# Altium PCB PCB1.PcbDoc
Units mm, origin at the board's own origin, x right, y up, seen from the top; angles counter-clockwise.
Board outline 66.42 x 57.02 mm, 2 copper layers (Top Layer, Bottom Layer); 46 components, 41 nets, 140 pads, 7 vias.
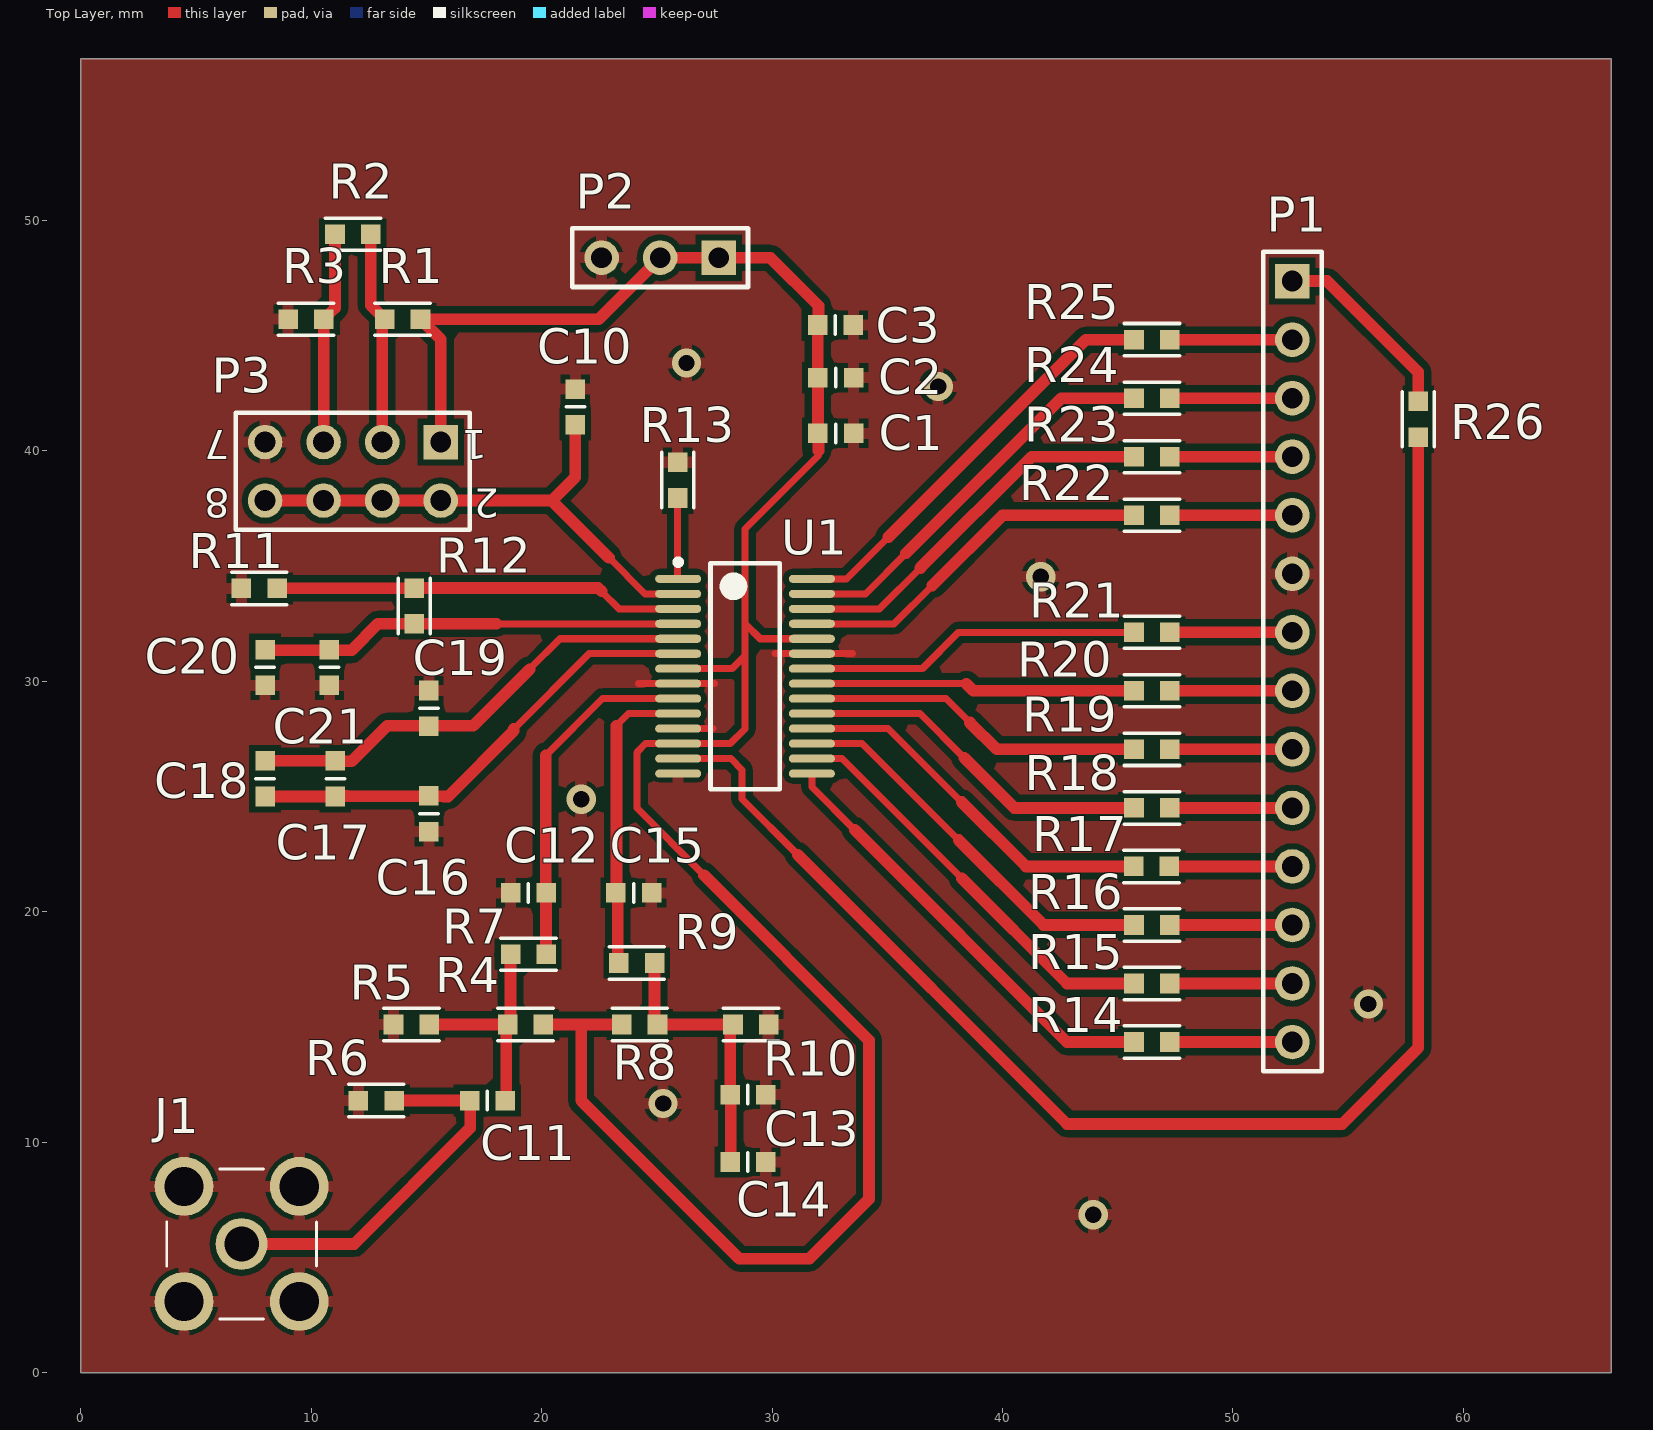
[diagram p0: Top Layer view]
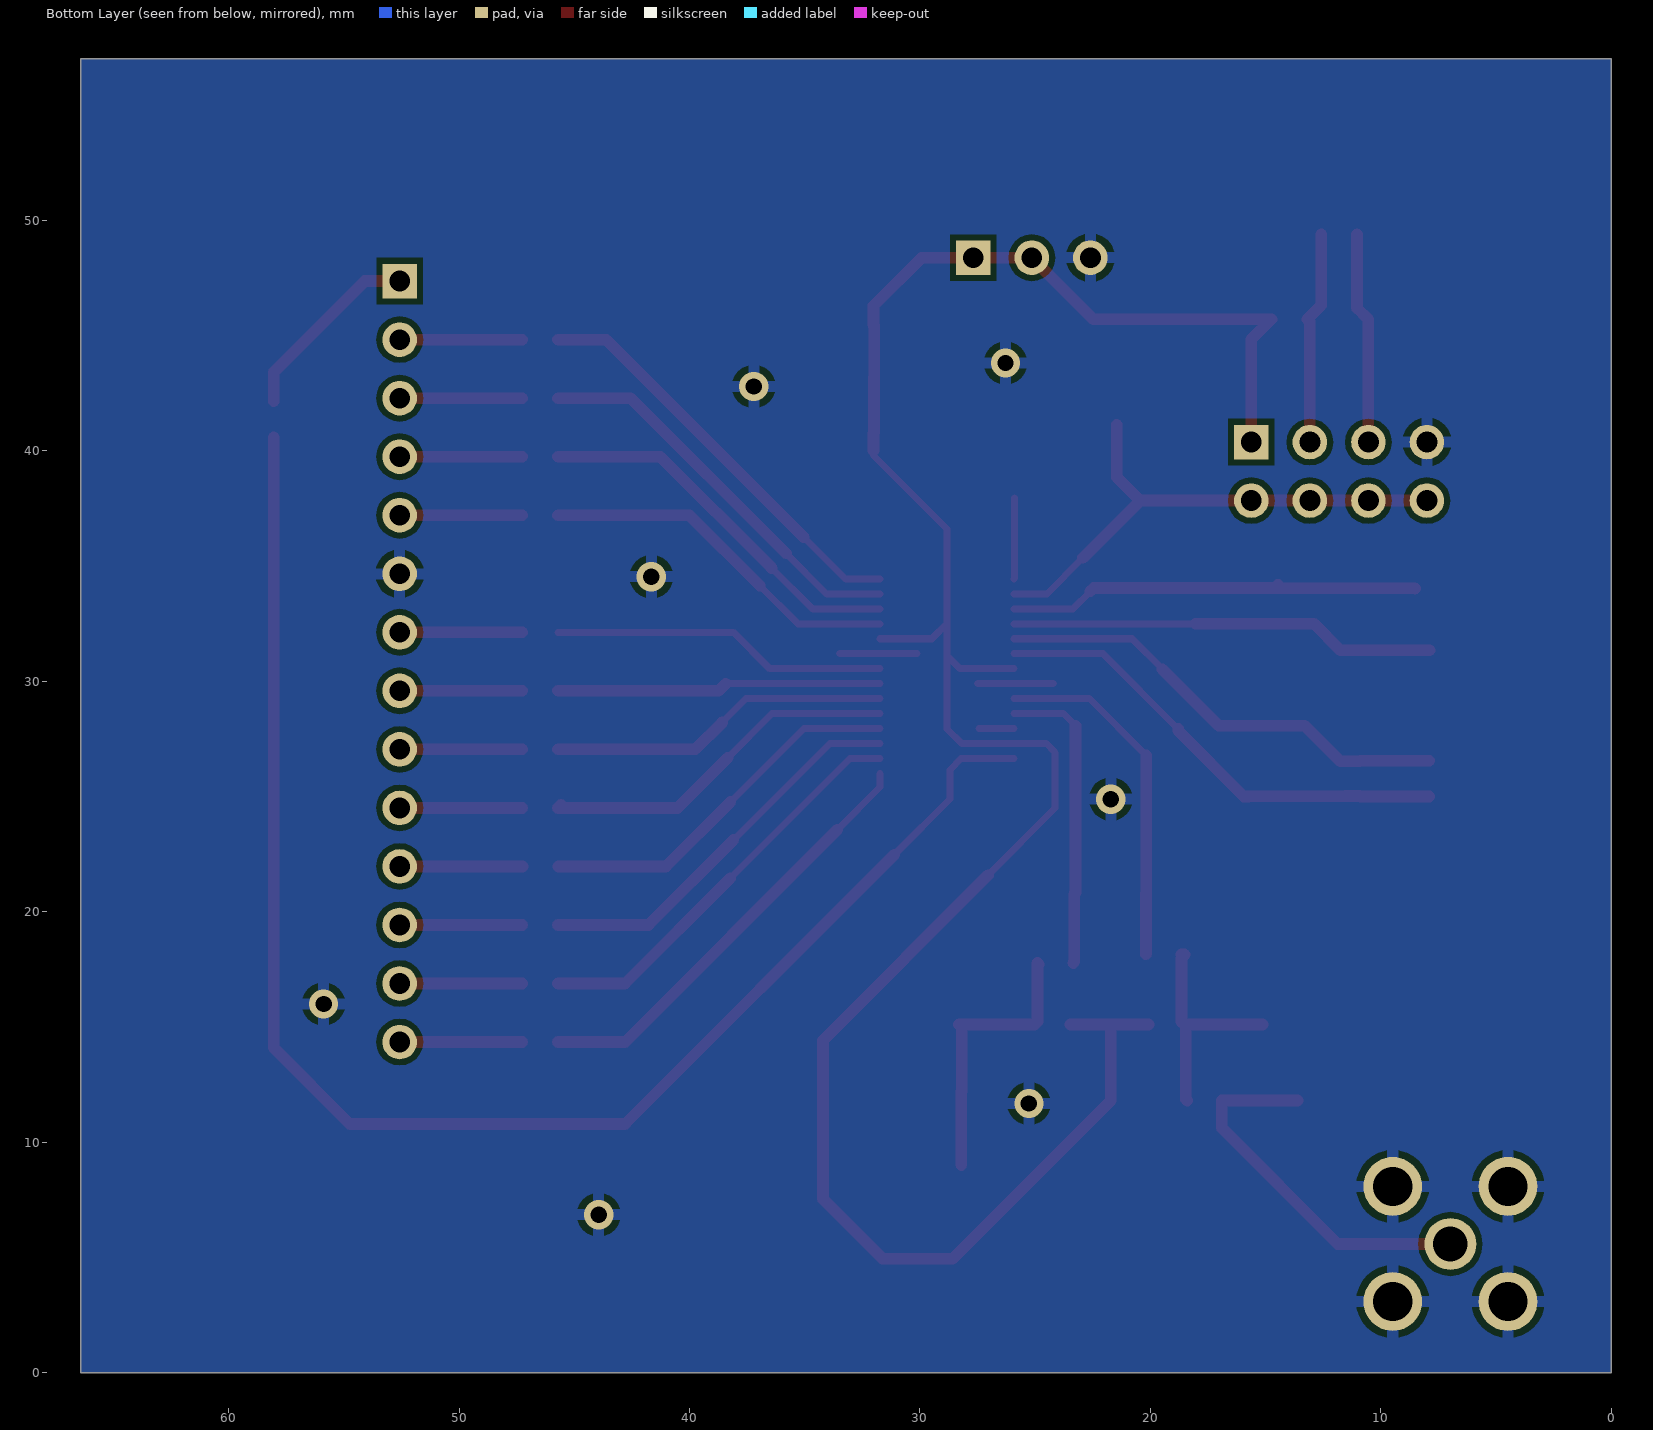
[diagram p1: Bottom Layer view, seen from below]
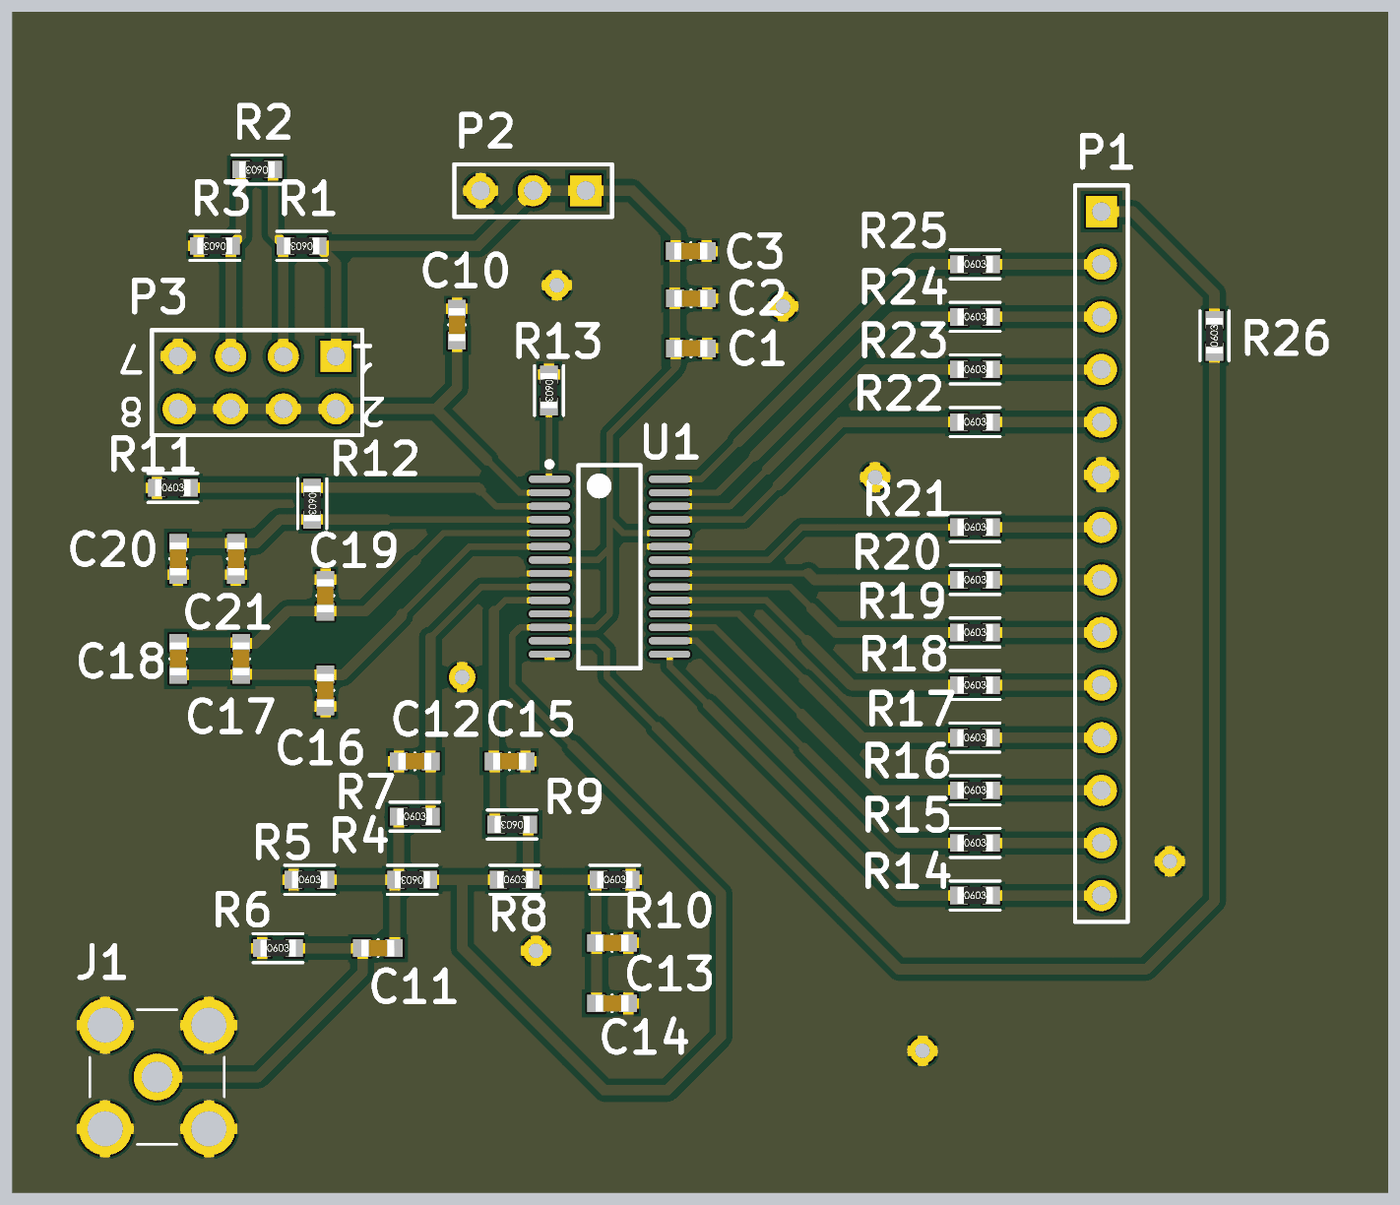
[diagram p2: 3D render of the assembled board from above, using the file's embedded part models]

## Layer stack, top to bottom
Top Solder: solder mask 0.0102, Solder Resist, Dk 3.5
Top Layer: signal copper 0.0356
Dielectric 1: dielectric 0.32, FR-4, Dk 4.8
Bottom Layer: signal copper 0.0356
Bottom Solder: solder mask 0.0102, Solder Resist, Dk 3.5

## Board outline
0,0 66.421,0 66.421,57.023 0,57.023

## Design rules (kind name [scope] priority, off if disabled: settings)
Clearance [All] p1: gap=0.254 ignorepadtopadclearanceinfootprint=FALSE except(0: Arc-Hole Track-Hole SMDPad-Hole THPad-Hole Via-Hole Fill-Hole Poly-Hole Region-Hole Text-Hole; 0.3: Arc-Via Arc-Fill Arc-Poly Arc-Region Track-Via Track-Fill Track-Poly Track-Region)
HoleSize [All] p1: absolutevalues=TRUE maxlimit=3 minlimit=0.7 maxpercent=80.000 minpercent=20.000
MinimumSolderMaskSliver [All] p1: minsoldermaskwidth=0.125
PlaneConnect [All] p1: planeconnectstyle=Relief reliefexpansion=0.508 reliefentries=4 reliefconductorwidth=0.305 reliefairgap=0.254
PolygonConnect [All] p1: connectstyle=Relief reliefconductorwidth=0.5 reliefentries=4 polygonreliefangle="90 Angle" airgapwidth=0.2
RoutingVias [All] p1: holewidth=0.7 width=1.6 viastyle="Through Hole" minholewidth=0.7 minwidth=1.6 maxholewidth=0.7 maxwidth=1.6
SilkToSilkClearance [All] p1: silktosilkclearance=0.12
SilkToSolderMaskClearance [IsPad] p1: minsilkscreentomaskgap=0.1 clearancetoexposedcopper=TRUE
SolderMaskExpansion [All] p1: expansion=0.102 istentingtop=FALSE
Width [All] p1: maxlimit=3.048 minlimit=0.305 preferedwidth=0.508
25 further rules are at their usual default settings.

## Components (designator, comment, footprint, x,y, rotation, side; value= is the part's Value field where it differs from the comment)
C1 "10µF" SMD-0603C 32.766,40.767 r90 top
C2 "0.10µF" SMD-0603C 32.766,43.18 r90 top
C3 "1nF" SMD-0603C 32.753,45.466 r90 top value=1000pF
C10 "0.10µF" SMD-0603C 21.463,41.91 r0 top
C11 "0.33µF" SMD-0603C 17.653,11.811 r270 top
C12 "15pF" SMD-0603C 19.431,20.828 r270 top
C13 "10µF" SMD-0603C 28.956,12.065 r90 top
C14 "0.10µF" SMD-0603C 28.956,9.144 r90 top
C15 "15pF" SMD-0603C 24.003,20.828 r90 top
C16 "0.10µF" SMD-0603C 15.113,24.257 r180 top
C17 "0.10µF" SMD-0603C 11.049,25.781 r180 top
C18 "10µF" SMD-0603C 8.001,25.781 r180 top
C19 "0.10µF" SMD-0603C 15.113,28.829 r180 top
C20 "10µF" SMD-0603C 8.001,30.607 r0 top
C21 "0.10µF" SMD-0603C 10.795,30.607 r0 top
J1 "SMACONNECTOR" LPRS_SMACONNECTOR 6.985,5.588 r0 top
P1 "Jrpi" HDR1X14 52.578,47.371 r270 top
P2 "Supply" HDR1X3 27.686,48.387 r180 top
P3 "Header 4X2" HDR2X4 15.621,40.386 r180 top
R1 "1k" SMD-0603-RES 13.97,45.72 r90 top
R2 "1k" SMD-0603-RES 11.811,49.403 r90 top
R3 "1k" SMD-0603-RES 9.779,45.72 r90 top
R4 "1k" SMD-0603-RES 19.304,15.113 r90 top
R5 "1k" SMD-0603-RES 14.351,15.113 r270 top
R6 "47" SMD-0603-RES 12.827,11.811 r270 top
R7 "22" SMD-0603-RES 19.431,18.161 r270 top
R8 "1k" SMD-0603-RES 24.257,15.113 r270 top
R9 "22" SMD-0603-RES 24.13,17.78 r90 top
R10 "1k" SMD-0603-RES 29.083,15.113 r270 top
R11 "NC" SMD-0603-RES 7.747,34.036 r270 top value=0.02
R12 "0" SMD-0603-RES 14.478,33.274 r180 top value=0.02
R13 "NC" SMD-0603-RES 25.908,38.735 r180 top value=0.02
R14 "390" SMD-0603-RES 46.482,14.351 r270 top
R15 "390" SMD-0603-RES 46.482,16.891 r270 top
R16 "390" SMD-0603-RES 46.482,19.431 r270 top
R17 "390" SMD-0603-RES 46.469,21.971 r270 top
R18 "390" SMD-0603-RES 46.482,24.511 r270 top
R19 "390" SMD-0603-RES 46.482,27.051 r270 top
R20 "390" SMD-0603-RES 46.482,29.591 r270 top
R21 "390" SMD-0603-RES 46.482,32.131 r270 top
R22 "390" SMD-0603-RES 46.482,37.211 r270 top
R23 "390" SMD-0603-RES 46.482,39.751 r270 top
R24 "390" SMD-0603-RES 46.482,42.291 r270 top
R25 "390" SMD-0603-RES 46.482,44.831 r270 top
R26 "390" SMD-0603-RES 58.039,41.376 r0 top
U1 "AD9235BRUZ-65" RU-28_M 28.829,30.226 r0 top

## Footprints (in the part's own frame and the unit in brackets; to place one, negate y for a bottom-side part, rotate by r counter-clockwise, add the part's x,y. Pads: shape width x height; smd on the part's side, far side on the other; paste and mask are expansions set on the pad)
HDR1X3 [mm] "Connector; Header; 3 Position"
  rect 1.5x1.5 hole 0.9: 1(0,0)
  round 1.5 hole 0.9: 2(2.54,0) 3(5.08,0)
  silkscreen extent -1.27,-1.27 6.35,1.27
HDR1X14 [mm] "Connector; Header; 14 Position"
  rect 1.5x1.5 hole 0.9: 1(0,0)
  round 1.5 hole 0.9: 2(2.54,0) 3(5.08,0) 4(7.62,0) 5(10.16,0) 6(12.7,0) 7(15.24,0) 8(17.78,0) 9(20.32,0) 10(22.86,0) 11(25.4,0) 12(27.94,0) 13(30.48,0) 14(33.02,0)
  silkscreen extent -1.27,-1.27 34.29,1.27
HDR2X4 [mm] "Connector; Header; 4x2 Position"
  rect 1.5x1.5 hole 0.9: 1(0,0)
  round 1.5 hole 0.9: 2(0,2.54) 3(2.54,0) 4(2.54,2.54) 5(5.08,0) 6(5.08,2.54) 7(7.62,0) 8(7.62,2.54)
  silkscreen extent -1.27,-1.27 8.89,3.81
LPRS_SMACONNECTOR [mm]
  round 2.25 hole 1.5: 1(0,0)
  round 2.55 hole 1.7: 2(2.5,2.5) 3(2.5,-2.5) 4(-2.5,-2.5) 5(-2.5,2.5)
  silkscreen extent -3.25,-3.25 3.25,3.25
RU-28_M [mm] "TSOP, 28-Leads, Body 9.7x4.4mm, Pitch 0.65mm, IPC Low Density"
  oval 2x0.35 smd: 1(-2.9,4.225) 2(-2.9,3.575) 3(-2.9,2.925) 4(-2.9,2.275) 5(-2.9,1.625) 6(-2.9,0.975) 7(-2.9,0.325) 8(-2.9,-0.325) 9(-2.9,-0.975) 10(-2.9,-1.625) 11(-2.9,-2.275) 12(-2.9,-2.925) 13(-2.9,-3.575) 14(-2.9,-4.225) 15(2.9,-4.225) 16(2.9,-3.575) 17(2.9,-2.925) 18(2.9,-2.275) 19(2.9,-1.625) 20(2.9,-0.975) 21(2.9,-0.325) 22(2.9,0.325) 23(2.9,0.975) 24(2.9,1.625) 25(2.9,2.275) 26(2.9,2.925) 27(2.9,3.575) 28(2.9,4.225)
  silkscreen extent -3.02,-4.9 1.5,5.07, body extent -2.25,-4.9 2.25,4.9, height 1.2
SMD-0603-RES [mm]
  rect 0.85x0.85 smd: 1(0,0.775) 2(0,-0.775)
  silkscreen extent -0.7,-1.2 0.7,1.2, body extent -0.4,-0.85 0.4,0.85, height 0.56
SMD-0603C [mm]
  rect 0.85x0.85 smd: 1(0,0.775) 2(0,-0.775)
  silkscreen extent -0.4,0 0.4,0, body extent -0.4,-0.8 0.4,0.8, height 0.9

## Part data
C1 C13 C18 C20: library part GRM185R60J106ME15D, "CAP CER 10UF 6.3V X5R 0603", Digi-Key Part Number=490-10467-1-ND, Manufacturer="Murata Electronics North America", Operating Temperature="-55°C ~ 85°C", Package / Case="0603 (1608 Metric)", Ratings=-, Temperature Coefficient=X5R, Tolerance=±20%, Voltage=6.3V, @ qty=0, Applications="General Purpose", Datasheets=http://www.murata.com/~/media/webrenewal/support/library/catalog/products/capacitor/mlcc/c02e.pdf, Factory Stock=0, Features="Derating Recommended", Height - Seated (Max)=-, Image=//media.digikey.com/Renders/Murata%20Renders/ZRB-SERIES-0402.jpg, Lead Spacing=-, Lead Style=-, Minimum Quantity=1, Mounting Type="Surface Mount, MLCC", Packaging="Cut Tape (CT)", Part Number=GRM185R60J106ME15D, Part Status=Active, Quantity Available=25068, Series=GRM, Size / Dimension="0.063\" L x 0.031\" W (1.60mm x 0.80mm)", Thickness (Max)="0.022\" (0.55mm)", Unit Price (USD)=0.36
C2 C10 C14 C16 C17 C19 C21: library part GCJ188R71C104KA01D, "CAP CER 0.1UF 16V X7R 0603", Digi-Key Part Number=490-5796-1-ND, Manufacturer="Murata Electronics North America", Operating Temperature="-55°C ~ 125°C", Package / Case="0603 (1608 Metric)", Ratings=AEC-Q200, Temperature Coefficient=X7R, Tolerance=±10%, Voltage=16V, @ qty=0, Applications="Automotive, Boardflex Sensitive", Datasheets=http://www.murata.com/~/media/webrenewal/support/library/catalog/products/capacitor/mlcc/c03e.ashx, Factory Stock=0, Features="Soft Termination", Height - Seated (Max)=-, Image=//media.digikey.com/Renders/Murata%20Renders/0603%28LQG18%29.jpg, Lead Spacing=-, Lead Style=-, Minimum Quantity=1, Mounting Type="Surface Mount, MLCC", Packaging="Cut Tape (CT)", Part Number=GCJ188R71C104KA01D, Part Status=Active, Quantity Available=22473, Series=GCJ, Size / Dimension="0.063\" L x 0.031\" W (1.60mm x 0.80mm)", Thickness (Max)="0.035\" (0.90mm)", Unit Price (USD)=0.21
C3: library part GCJ188R71H102KA01D, "CAP CER 1000PF 50V X7R 0603", Digi-Key Part Number=490-5768-1-ND, Manufacturer="Murata Electronics North America", Operating Temperature="-55°C ~ 125°C", Package / Case="0603 (1608 Metric)", Ratings=AEC-Q200, Temperature Coefficient=X7R, Tolerance=±10%, Voltage=50V, @ qty=0, Applications="Automotive, Boardflex Sensitive", Datasheets=http://www.murata.com/~/media/webrenewal/support/library/catalog/products/capacitor/mlcc/c03e.ashx, Factory Stock=0, Features="Soft Termination", Height - Seated (Max)=-, Image=//media.digikey.com/Renders/Murata%20Renders/0603%28LQG18%29.jpg, Lead Spacing=-, Lead Style=-, Minimum Quantity=1, Mounting Type="Surface Mount, MLCC", Packaging="Cut Tape (CT)", Part Number=GCJ188R71H102KA01D, Part Status=Active, Quantity Available=21434, Series=GCJ, Size / Dimension="0.063\" L x 0.031\" W (1.60mm x 0.80mm)", Thickness (Max)="0.031\" (0.80mm)", Unit Price (USD)=0.16
C11: library part GCM188R71C334KA37D, "CAP CER 0.33UF 16V X7R 0603", Digi-Key Part Number=490-6050-1-ND, Manufacturer="Murata Electronics North America", Operating Temperature="-55°C ~ 125°C", Package / Case="0603 (1608 Metric)", Ratings=AEC-Q200, Temperature Coefficient=X7R, Tolerance=±10%, Voltage=16V, @ qty=0, Applications=Automotive, Datasheets=http://www.murata.com/~/media/webrenewal/support/library/catalog/products/capacitor/mlcc/c03e.ashx, Factory Stock=0, Features=-, Height - Seated (Max)=-, Image=//media.digikey.com/Renders/Murata%20Renders/0603%28GCM188%29.jpg, Lead Spacing=-, Lead Style=-, Minimum Quantity=1, Mounting Type="Surface Mount, MLCC", Packaging="Cut Tape (CT)", Part Number=GCM188R71C334KA37D, Part Status=Active, Quantity Available=10234, Series=GCM, Size / Dimension="0.063\" L x 0.031\" W (1.60mm x 0.80mm)", Thickness (Max)="0.035\" (0.90mm)", Unit Price (USD)=0.19
C12 C15: library part GCM1885C1H150JA16D, "CAP CER 15PF 50V NP0 0603", Digi-Key Part Number=490-4957-1-ND, Manufacturer="Murata Electronics North America", Operating Temperature="-55°C ~ 125°C", Package / Case="0603 (1608 Metric)", Ratings=AEC-Q200, Temperature Coefficient="C0G, NP0", Tolerance=±5%, Voltage=50V, @ qty=0, Applications=Automotive, Datasheets=http://www.murata.com/~/media/webrenewal/support/library/catalog/products/capacitor/mlcc/c03e.ashx, Factory Stock=0, Features=-, Height - Seated (Max)=-, Image=//media.digikey.com/Renders/Murata%20Renders/0603%28GCM188%29.jpg, Lead Spacing=-, Lead Style=-, Minimum Quantity=1, Mounting Type="Surface Mount, MLCC", Packaging="Cut Tape (CT)", Part Number=GCM1885C1H150JA16D, Part Status=Active, Quantity Available=99209, Series=GCM, Size / Dimension="0.063\" L x 0.031\" W (1.60mm x 0.80mm)", Thickness (Max)="0.035\" (0.90mm)", Unit Price (USD)=0.1
J1: "SMA female RF coaxial connector for SMA male RF antennas.", Package=None, Availability=Unavailable, MP=SMACONNECTOR, Price=None
P1: library part "Header 14", "Header, 14-Pin", LatestRevisionDate=17-Jul-2002, LatestRevisionNote="Re-released for DXP Platform.", Publisher="Altium Limited"
P2: library part "Header 3", "Header, 3-Pin", LatestRevisionDate=17-Jul-2002, LatestRevisionNote="Re-released for DXP Platform.", Publisher="Altium Limited"
P3: "Header, 4-Pin, Dual row", LatestRevisionDate=17-Jul-2002, LatestRevisionNote="Re-released for DXP Platform.", Publisher="Altium Limited"
R1 R2 R3 R4 R5 R8 R10: library part ERJ-3EKF1001V, "RES SMD 1K OHM 1% 1/10W 0603", Digi-Key Part Number=P1.00KHCT-ND, Manufacturer="Panasonic Electronic Components", Operating Temperature="-55°C ~ 155°C", Package / Case="0603 (1608 Metric)", Power (Watts)="0.1W, 1/10W", Supplier Device Package=0603, Temperature Coefficient=±100ppm/°C, Tolerance=±1%, @ qty=1500, Composition="Thick Film", Datasheets=http://industrial.panasonic.com/www-cgi/jvcr13pz.cgi?E+PZ+3+AOA0002+ERJ3EKF1001V+7+WW, Factory Stock=0, Failure Rate=-, Features="Automotive AEC-Q200", Height - Seated (Max)="0.022\" (0.55mm)", Image=//media.digikey.com/Photos/Panasonic%20Photos/MFG_ERJ-P6W%20Series.jpg, Minimum Quantity=1, Number of Terminations=2, Packaging="Cut Tape (CT)", Part Number=ERJ-3EKF1001V, Part Status=Active, Quantity Available=5218845, Series=ERJ, Size / Dimension="0.063\" L x 0.031\" W (1.60mm x 0.80mm)", Unit Price (USD)=0.00379
R6: library part ERJ-PA3F47R0V, "RES SMD 47 OHM 1% 1/4W 0603", Digi-Key Part Number=P47.00BYCT-ND, Manufacturer="Panasonic Electronic Components", Operating Temperature="-55°C ~ 155°C", Package / Case="0603 (1608 Metric)", Power (Watts)="0.25W, 1/4W", Supplier Device Package=0603, Temperature Coefficient=±100ppm/°C, Tolerance=±1%, @ qty=1500, Composition="Thick Film", Datasheets=https://industrial.panasonic.com/cdbs/www-data/pdf/RDA0000/AOA0000C243.pdf, Factory Stock=0, Failure Rate=-, Features="Automotive AEC-Q200, Pulse Withstanding", Height - Seated (Max)="0.022\" (0.55mm)", Image=//media.digikey.com/Photos/Panasonic%20Photos/MFG_ERJ-P6W%20Series.jpg, Minimum Quantity=1, Number of Terminations=2, Packaging="Cut Tape (CT)", Part Number=ERJ-PA3F47R0V, Part Status=Active, Quantity Available=13707, Series=ERJ, Size / Dimension="0.063\" L x 0.031\" W (1.60mm x 0.80mm)", Unit Price (USD)=0.02372
R7 R9: library part ERJ-3GEYJ220V, "RES SMD 22 OHM 5% 1/10W 0603", Digi-Key Part Number=P22GCT-ND, Manufacturer="Panasonic Electronic Components", Operating Temperature="-55°C ~ 155°C", Package / Case="0603 (1608 Metric)", Power (Watts)="0.1W, 1/10W", Supplier Device Package=0603, Temperature Coefficient=±200ppm/°C, Tolerance=±5%, @ qty=1500, Composition="Thick Film", Datasheets=http://industrial.panasonic.com/www-cgi/jvcr13pz.cgi?E+PZ+3+AOA0001+ERJ3GEYJ220V+7+WW, Factory Stock=0, Failure Rate=-, Features="Automotive AEC-Q200", Height - Seated (Max)="0.022\" (0.55mm)", Image=//media.digikey.com/Photos/Panasonic%20Photos/MFG_ERJ-P6W%20Series.jpg, Minimum Quantity=1, Number of Terminations=2, Packaging="Cut Tape (CT)", Part Number=ERJ-3GEYJ220V, Part Status=Active, Quantity Available=349892, Series=ERJ, Size / Dimension="0.063\" L x 0.031\" W (1.60mm x 0.80mm)", Unit Price (USD)=0.00321
R11 R12 R13: library part ERJ-3BWFR020V, "RES SMD 0.02 OHM 1% 1/3W 0603", Digi-Key Part Number=P17461CT-ND, Manufacturer="Panasonic Electronic Components", Operating Temperature="-55°C ~ 155°C", Package / Case="0603 (1608 Metric)", Power (Watts)="0.333W, 1/3W", Supplier Device Package=0603, Temperature Coefficient=±250ppm/°C, Tolerance=±1%, @ qty=1500, Composition="Thick Film", Datasheets=https://industrial.panasonic.com/cdbs/www-data/pdf/RDA0000/AOA0000C239.pdf, Factory Stock=0, Failure Rate=-, Features="Automotive AEC-Q200, Current Sense", Height - Seated (Max)="0.026\" (0.65mm)", Image=//media.digikey.com/Photos/Panasonic%20Photos/MFG_ERJ-P6W%20Series.jpg, Minimum Quantity=1, Number of Terminations=2, Packaging="Cut Tape (CT)", Part Number=ERJ-3BWFR020V, Part Status=Active, Quantity Available=4366, Series=ERJ, Size / Dimension="0.063\" L x 0.031\" W (1.60mm x 0.80mm)", Unit Price (USD)=0.07040
R14 R15 R16 R17 R18 R19 R20 R21 R22 R23 R24 R25 R26: library part ERJ-3EKF3900V, "RES SMD 390 OHM 1% 1/10W 0603", Digi-Key Part Number=P390HCT-ND, Manufacturer="Panasonic Electronic Components", Operating Temperature="-55°C ~ 155°C", Package / Case="0603 (1608 Metric)", Power (Watts)="0.1W, 1/10W", Supplier Device Package=0603, Temperature Coefficient=±100ppm/°C, Tolerance=±1%, @ qty=1500, Composition="Thick Film", Datasheets=http://industrial.panasonic.com/www-cgi/jvcr13pz.cgi?E+PZ+3+AOA0002+ERJ3EKF3900V+7+WW, Factory Stock=0, Failure Rate=-, Features="Automotive AEC-Q200", Height - Seated (Max)="0.022\" (0.55mm)", Image=//media.digikey.com/Photos/Panasonic%20Photos/MFG_ERJ-P6W%20Series.jpg, Minimum Quantity=1, Number of Terminations=2, Packaging="Cut Tape (CT)", Part Number=ERJ-3EKF3900V, Part Status=Active, Quantity Available=87884, Series=ERJ, Size / Dimension="0.063\" L x 0.031\" W (1.60mm x 0.80mm)", Unit Price (USD)=0.00379
U1: library part CMP-0313-01750-2, "Single 12-Bit Analog-to-Digital Converter with Parallel Interface, 65MSPS, -40 to +85 degC, RU-28, Pb-Free, Tube", Generic Part Number=AD9235-65, Manufacturer="Analog Devices", Channels=1, Code_JEDEC=MO-153-AE, ComponentLink1Description="Manufacturer URL", ComponentLink1URL=http://www.analog.com/en/index.html, ComponentLink2Description=Datasheet, ComponentLink2URL=http://www.analog.com/static/imported-files/data_sheets/AD9235.pdf, ComponentLink3Description="Package Specification", ComponentLink3URL=http://www.analog.com/static/imported-files/packages/249854663RU_28.pdf, ComponentLink4Description="Product URL", ComponentLink4URL=http://www.analog.com/en/analog-to-digital-converters/ad-converters/ad9235/products/product.html, DatasheetVersion=Rev.C, Interface=Par, Mounting Technology="Surface Mount", PackageDescription="28-Lead Thin Shrink Small Outline Package [TSSOP]", PackageReference=RU-28, PackageVersion=2005, Packing=Tube, PartNumber=AD9235BRUZ-65, Resolution (Bits)=12, RoHS=Y, Throughput Rate (SPS)=65M

## Via types
v1: diameter 1.27, hole 0.711, Top Layer to Bottom Layer, 7 vias

## Nets (pads, with @x,y where several pads share a name; then routed paths per layer and width w, separated by ;. In a path a pad name is that pad's centre, name@x,y a point inside that pad or via, vN(x,y) a via of type N, cw(c..) or ccw(c..) an arc to the next point about the centre after c; other vN are vias at no path point)
AVDD: C1.1 C2.1 C3.1 P2.1 P2.2 P3.1 R1.2 R4.2 R8.2 U1.7 U1.12 U1.24 | length 102.7
  Top Layer w0.305: U1.7 28.265,30.551 28.829,31.115 ; 27.051,21.59 24.138,24.503 24.138,26.924 24.515,27.301 U1.12 28.19,27.301 28.829,27.94 28.829,31.115 ; U1.24 29.49,31.851 28.829,32.512 ; 32.016,40.005 32.016,39.805 28.829,36.618 28.829,32.512 ; 28.829,31.115 28.829,32.512
  Top Layer w0.508: P3.1 15.621,44.844 R1.2 22.479,45.72 P2.2 P2.1 29.93,48.387 32.016,46.301 32.016,46.101 32.016,45.466 31.985,45.435 31.985,43.186 C2.1 31.991,40.792 32.016,40.767 32.016,40.005 ; R4.2 21.717,15.113 ; R8.2 21.717,15.113 ; 27.051,21.59 34.207,14.434 34.207,7.537 31.623,4.953 28.575,4.953 21.717,11.811 21.717,15.113
GND: C1.2 C2.2 C3.2 C10.1 C12.2 C13.2 C14.2 C15.2 C16.1 C19.2 C20.2 C21.2 J1.2 J1.3 J1.4 J1.5 P1.6 P2.3 P3.7 R3.1 R5.2 R6.2 R10.1 R11.2 R13.2 U1.8 U1.11 U1.14 U1.23 | length 8.2
  Top Layer w0.305: 24.201,29.901 U1.8 27.503,29.901 ; U1.11 27.443,27.951 ; 30.14,31.201 U1.23 33.487,31.201
  Top Layer w0.508: P3.7@7.983,40.404 P3.7
  other v1: 43.942,6.858 25.273,11.684 55.88,16.002 21.717,24.892 41.656,34.544 37.211,42.799 26.289,43.815
NetC10_2: C10.2 P3.2 P3.4 P3.6 P3.8 U1.2 | length 23.3
  Top Layer w0.305: 22.924,35.369 24.492,33.801 U1.2
  Top Layer w0.508: P3.8 P3.6 P3.4 P3.2 20.447,37.846 ; C10.2 21.463,38.862 20.447,37.846 ; 22.924,35.369 20.447,37.846
NetC11_1: C11.1 R4.1 R5.1 R7.2 | length 10.1
  Top Layer w0.508: R5.1 R4.1 ; C11.1@18.403,11.811 18.466,11.874 18.466,15.05 18.656,15.24 18.656,17.99 18.506,18.14 18.527,18.161 R7.2
NetC11_2: C11.2 J1.1 R6.1 | length 16.5
  Top Layer w0.508: J1.1 11.867,5.588 16.903,10.624 16.903,11.811 R6.1
NetC12_1: C12.1 R7.1 U1.9 | length 15.4
  Top Layer w0.305: 20.181,26.785 22.647,29.251 U1.9
  Top Layer w0.508: 20.181,26.785 20.181,20.828 20.194,20.816 20.194,18.173 R7.1
NetC13_1: C13.1 C14.1 R8.1 R9.2 R10.2 | length 12.2
  Top Layer w0.508: R9.2 24.841,17.716 24.905,17.653 24.905,15.24 R8.1 R10.2 28.182,14.987 28.182,12.216 28.206,12.192 C14.1@28.206,9.017
NetC15_1: C15.1 R9.1 U1.10 | length 13.2
  Top Layer w0.305: 23.253,28.079 23.775,28.601 U1.10
  Top Layer w0.508: 23.253,28.079 23.253,20.828 23.304,20.777 23.304,17.831 R9.1
NetC16_2: C16.2 C17.1 C18.1 U1.6 | length 20.7
  Top Layer w0.305: 18.796,27.94 22.057,31.201 U1.6
  Top Layer w0.508: C18.1@7.899,25.006 10.878,25.006 10.903,25.031 11.557,25.031 11.569,25.019 15.113,25.019 15.736,25.019 15.748,25.007 15.948,25.007 18.796,27.855 18.796,27.94
NetC17_2: C17.2 C18.2 C19.1 U1.5 | length 20.2
  Top Layer w0.305: 19.481,30.53 20.802,31.851 U1.5
  Top Layer w0.508: C18.2@7.899,26.556 10.878,26.556 10.903,26.531 11.757,26.531 13.305,28.079 15.113,28.079 15.748,28.079 17.03,28.079 19.481,30.53
NetC20_1: C20.1 C21.1 R12.1 U1.4 | length 18.5
  Top Layer w0.305: 18.045,32.501 U1.4
  Top Layer w0.508: C20.1@7.874,31.357 11.557,31.357 11.757,31.357 12.899,32.499 R12.1 14.48,32.501 18.045,32.501
NetP1_1: P1.1 R26.1 | length 8.4
  Top Layer w0.508: P1.1 54.09,47.371 58.039,43.422 R26.1
NetP1_2: P1.2 R25.1 | length 5.3
  Top Layer w0.508: R25.1 P1.2
NetP1_3: P1.3 R24.1 | length 5.3
  Top Layer w0.508: R24.1 P1.3
NetP1_4: P1.4 R23.1 | length 5.3
  Top Layer w0.508: R23.1 P1.4
NetP1_5: P1.5 R22.1 | length 5.3
  Top Layer w0.508: R22.1 P1.5
NetP1_7: P1.7 R21.1 | length 5.3
  Top Layer w0.508: R21.1 P1.7
NetP1_8: P1.8 R20.1 | length 5.3
  Top Layer w0.508: R20.1 P1.8
NetP1_9: P1.9 R19.1 | length 5.3
  Top Layer w0.508: R19.1 P1.9
NetP1_10: P1.10 R18.1 | length 5.3
  Top Layer w0.508: R18.1 P1.10
NetP1_11: P1.11 R17.1 | length 5.3
  Top Layer w0.508: R17.1 P1.11
NetP1_12: P1.12 R16.1 | length 5.3
  Top Layer w0.508: R16.1 P1.12
NetP1_13: P1.13 R15.1 | length 5.3
  Top Layer w0.508: R15.1 P1.13
NetP1_14: P1.14 R14.1 | length 5.3
  Top Layer w0.508: R14.1 P1.14
NetP3_3: P3.3 R1.1 R2.2 | length 9.3
  Top Layer w0.508: R2.2 12.586,46.329 R1.1 13.081,45.606 P3.3
NetP3_5: P3.5 R2.1 R3.2 | length 9.2
  Top Layer w0.508: P3.5 10.547,40.392 10.547,45.714 R3.2 11.036,46.202 R2.1
NetR11_1: R11.1 R12.2 U1.3 | length 17.8
  Top Layer w0.305: 22.606,33.909 23.364,33.151 U1.3
  Top Layer w0.508: R11.1 8.528,34.042 14.472,34.042 R12.2 22.466,34.049 22.606,33.909 ; R12.2@14.46,34.181 R12.2@14.478,34.199
NetR13_1: R13.1 U1.1 | length 3.5
  Top Layer w0.305: R13.1 25.908,34.472 U1.1
NetR14_2: R14.2 U1.15 | length 19.1
  Top Layer w0.305: U1.15 31.729,25.421 33.591,23.558
  Top Layer w0.508: 33.591,23.558 42.799,14.351 R14.2
NetR15_2: R15.2 U1.16 | length 18
  Top Layer w0.305: U1.16 33.039,26.651 38.227,21.463
  Top Layer w0.508: 38.227,21.463 42.799,16.891 R15.2
NetR16_2: R16.2 U1.17 | length 17.2
  Top Layer w0.305: U1.17 33.913,27.301 38.1,23.114
  Top Layer w0.508: 38.1,23.114 41.783,19.431 R16.2
NetR17_2: R17.2 U1.18 | length 16.4
  Top Layer w0.305: U1.18 35.041,27.951 38.227,24.765
  Top Layer w0.508: 38.227,24.765 41.021,21.971 R17.2
NetR18_2: R18.2 U1.19 | length 15.9
  Top Layer w0.305: U1.19 36.423,28.601 38.341,26.683
  Top Layer w0.508: 38.341,26.683 40.513,24.511 R18.2 R18.2@45.58,24.638
NetR19_2: R19.2 U1.20 | length 14.9
  Top Layer w0.305: U1.20 37.551,29.251 38.588,28.215
  Top Layer w0.508: 38.588,28.215 39.751,27.051 R19.2
NetR20_2: R20.2 U1.21 | length 14.1
  Top Layer w0.305: U1.21 38.425,29.901
  Top Layer w0.508: 38.425,29.901 38.735,29.591 R20.2
NetR21_2: R21.2 U1.22 | length 14.6
  Top Layer w0.305: U1.22 36.52,30.551 38.1,32.131 R21.2
NetR22_2: R22.2 U1.25 | length 15.9
  Top Layer w0.305: U1.25 35.295,32.501 36.957,34.163
  Top Layer w0.508: 36.957,34.163 40.005,37.211 R22.2
NetR23_2: R23.2 U1.26 | length 16.7
  Top Layer w0.305: U1.26 34.667,33.151 36.441,34.925
  Top Layer w0.508: 36.441,34.925 41.267,39.751 R23.2
NetR24_2: R24.2 U1.27 | length 17.5
  Top Layer w0.305: U1.27 34.055,33.801 35.814,35.56
  Top Layer w0.508: 35.814,35.56 42.545,42.291 R24.2
NetR25_2: R25.2 U1.28 | length 18.3
  Top Layer w0.305: U1.28 33.24,34.451 35.052,36.263
  Top Layer w0.508: 35.052,36.263 43.62,44.831 R25.2
NetR26_2: R26.2 U1.13 | length 67.3
  Top Layer w0.305: U1.13 28.213,26.651 28.702,26.162 28.702,24.892 31.115,22.479
  Top Layer w0.508: 31.115,22.479 42.799,10.795 54.737,10.795 58.039,14.097 R26.2

## Polygon pours and split planes (outlines as drawn)
GND on Bottom Layer "GND_L02_P008" (solid, pour order 8): 66.421,57.023 66.421,0 0,0 0,57.023
no net on Bottom Layer "NONET_L02_P007" (solid, pour order 7): 0,57.023
no net on Bottom Layer "NONET_L02_P006" (solid, pour order 6): 0.144,57.041
no net on Bottom Layer "NONET_L02_P005" (solid, shelved, pour order 5): 0,0
no net on Bottom Layer "NONET_L02_P003" (solid, shelved, pour order 3): 0,57.15
no net on Bottom Layer "NONET_L02_P001" (solid, shelved, pour order 1): 66.802,57.531
GND on Top Layer "GND_L01_P004" (solid, remove dead copper, pour order 4): 0,57.023 66.421,57.023 66.421,0 0,0
no net on Top Layer "NONET_L01_P009" (solid, shelved, pour order 9): 0,57.023 66.421,57.023 66.421,0 0,0

## Text inside footprints (layer, text, board x,y; h text height)
P3: Top Overlay "2" at 18.161,38.354 h1.27 r180; Top Overlay "1" at 17.653,40.894 h1.27 r180; Top Overlay "7" at 6.477,40.894 h1.27 r180; Top Overlay "8" at 6.477,38.354 h1.27 r180